# Altium PCB PCB1.PcbDoc
Units mil, origin at the board's own origin, x right, y up, seen from the top; angles counter-clockwise.
Board outline 840 x 840 mil, 2 copper layers (Top Layer, Bottom Layer); 11 components, 17 nets, 57 pads, 17 vias.
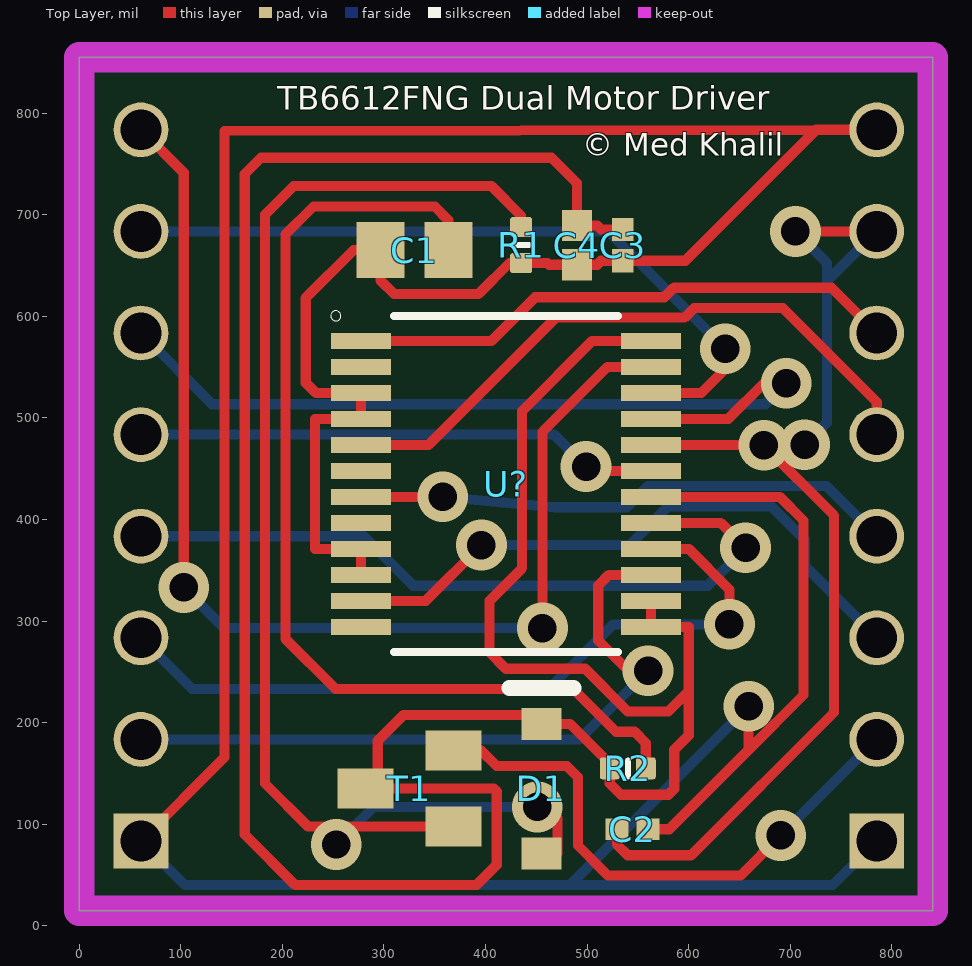
[diagram p0: Top Layer view]
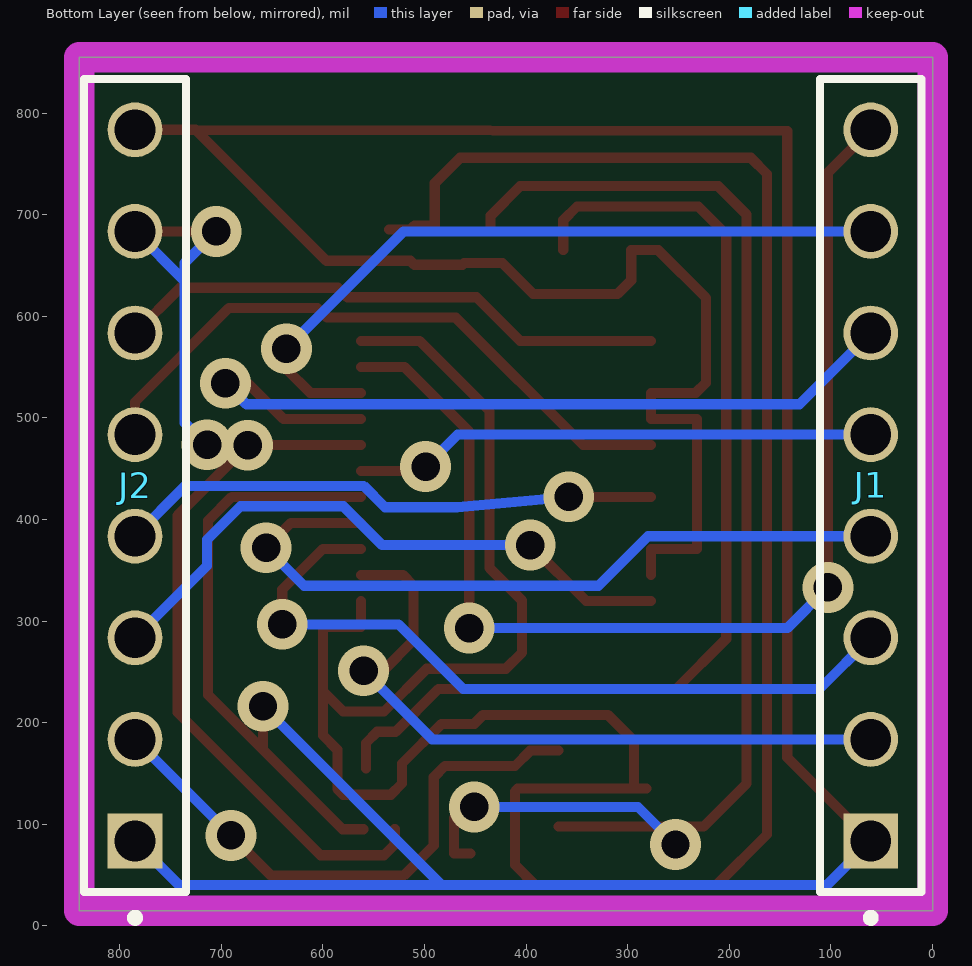
[diagram p1: Bottom Layer view, seen from below]
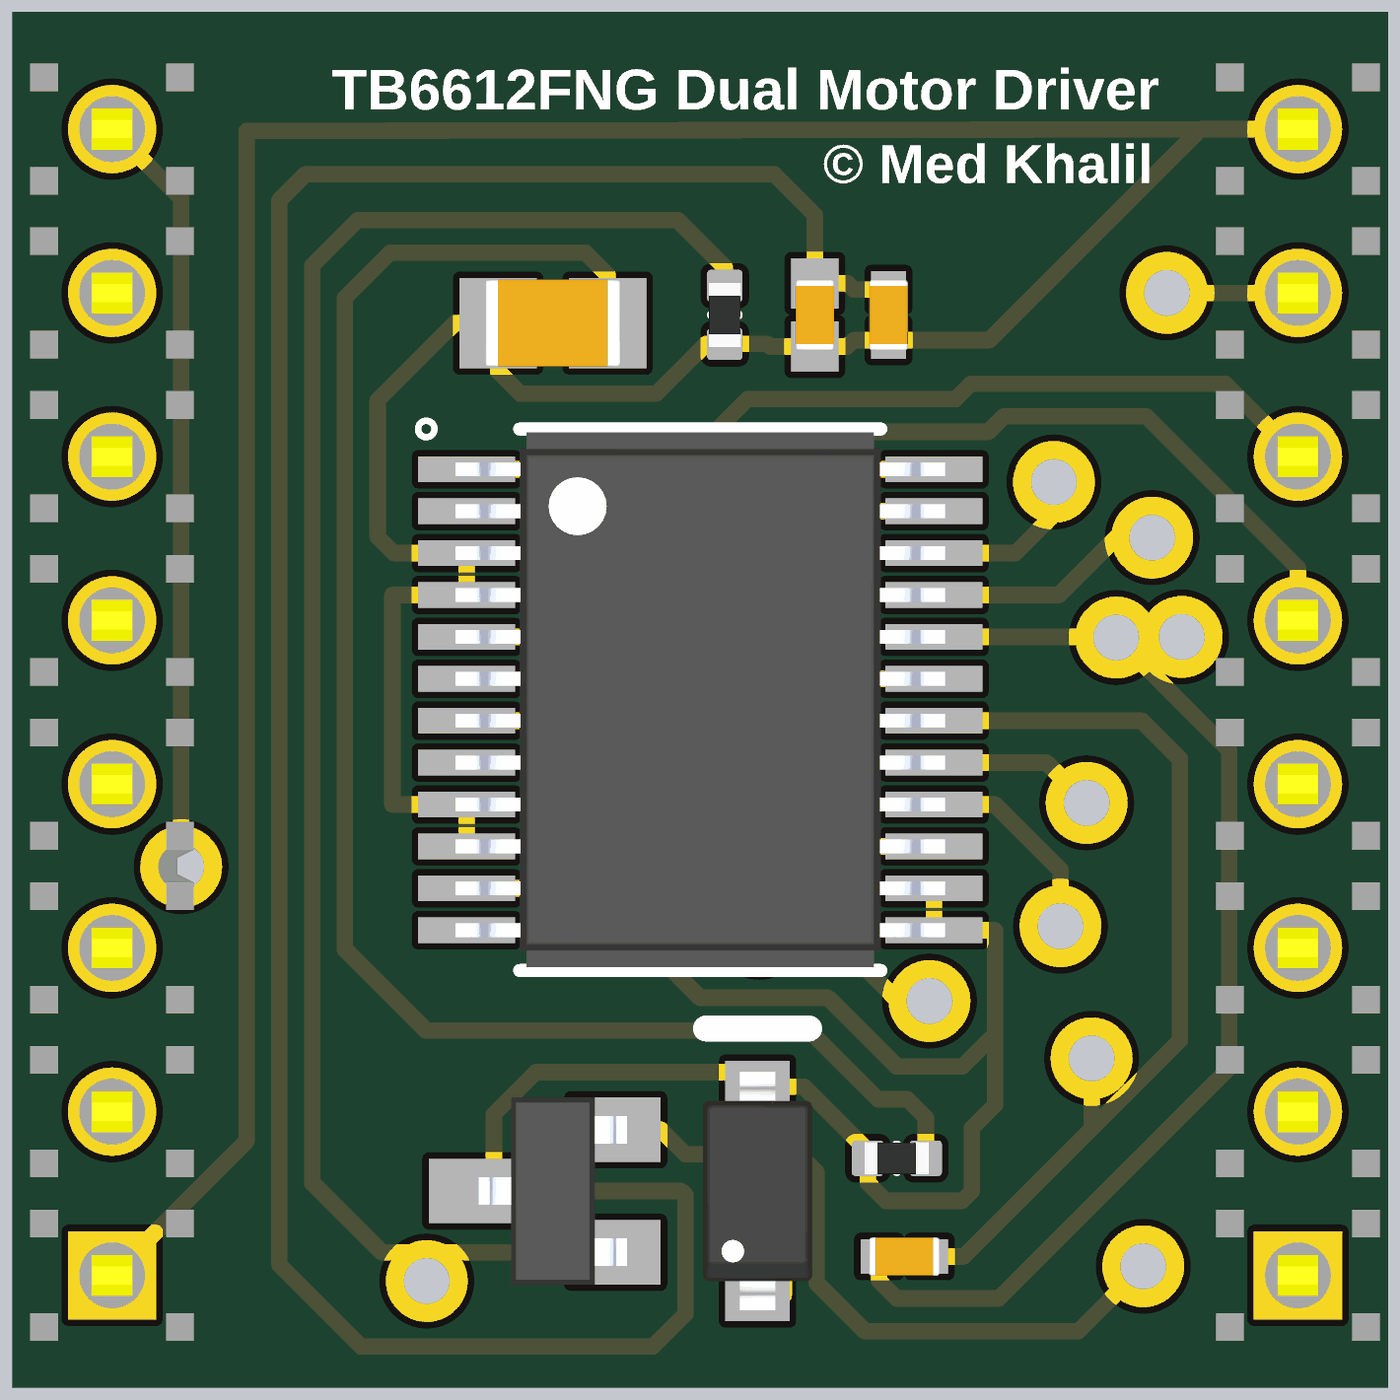
[diagram p2: 3D render of the assembled board from above, using the file's embedded part models]

## Layer stack, top to bottom
Top Solder: solder mask 0.4, Solder Resist, Dk 3.5
Top Layer: signal copper 1.4
Dielectric 1: dielectric 12.6, FR-4, Dk 4.8
Bottom Layer: signal copper 1.4
Bottom Solder: solder mask 0.4, Solder Resist, Dk 3.5

## Board outline
0,15 0,855 840,855 840,15

## Design rules (kind name [scope] priority, off if disabled: settings)
Clearance [All] p1: gap=10 ignorepadtopadclearanceinfootprint=FALSE
PolygonConnect [All] p1: connectstyle=Relief reliefconductorwidth=10 reliefentries=4 polygonreliefangle="90 Angle" airgapwidth=10
RoutingVias [All] p1: holewidth=28 width=50 viastyle="Through Hole" minholewidth=28 minwidth=50 maxholewidth=28 maxwidth=50
SolderMaskExpansion [All] p1: expansion=4 istentingtop=FALSE
SupplyNets "Schematic Supply Nets_3" [InNet('VMOT')] p1: voltage=0.000
SupplyNets "Schematic Supply Nets_2" [InNet('GND')] p2: voltage=0.000
SupplyNets "Schematic Supply Nets_1" [InNet('VCC')] p3: voltage=0.000
SupplyNets "Schematic Supply Nets" [InNet('VM')] p4: voltage=0.000
Width [All] p1: maxlimit=10 minlimit=10 preferedwidth=10
30 further rules are at their usual default settings.

## Components (designator, comment, footprint, x,y, rotation, side; value= is the part's Value field where it differs from the comment)
C1 "Capacitor 10 uF +/- 10% 16 V 0805" CAPC2013X135X45NL10T25 330,665 r0 top value=10µF
C2 "Capacitor 0.1 uF +/- 5% 16 V 0402" CAPC1005X56X25LL10T15 544.65,95 r0 top value=100nF
C3 "Capacitor 0.1 uF +/- 5% 16 V 0402" CAPC1005X56X25LL10T15 535,670 r90 top value=100nF
C4 "Capacitor 0.5 pF +/- 0.1pF 25 V 0402" CAPC1005X56X25ML10T15 490,670 r90 top value="0.47 uF"
D1 "CESD5V0D1" JSCJ-SOD-123-2_V 455,135 r90 top
J1 "TSW-108-07-G-S" SAMTEC_TSW-108-07-G-S 60.83,433.46 r90 bottom
J2 "TSW-108-07-G-S" SAMTEC_TSW-108-07-G-S 785,433.46 r90 bottom
R1 "100KR2F" RESC0402(1005)_L 435,670 r90 top value=100k
R2 "Resistor 9K1  +/-5 % 0402 63 mW" RESC0402(1005)_L 540,155 r180 top value=1k
T1 "PMV20EN" SOT23-BEC 325,135 r90 top
U? "TB6612FNG(O,C,8,EL" SOP65P760X160-24N 420,435 r0 top

## Footprints (in the part's own frame and the unit in brackets; to place one, negate y for a bottom-side part, rotate by r counter-clockwise, add the part's x,y. Pads: shape width x height; smd on the part's side, far side on the other; paste and mask are expansions set on the pad)
CAPC1005X56X25LL10T15 [mm] "Chip Capacitor, 2-Leads, Body 1.10x0.60mm, IPC High Density"
  rect 0.58x0.54 smd: 1(-0.39,0) 2(0.39,0)
  body extent -0.55,-0.3 0.55,0.3, height 0.56
CAPC1005X56X25ML10T15 [mm] "Chip Capacitor, 2-Leads, Body 1.10x0.60mm, IPC Low Density"
  rect 0.78x0.74 smd: 1(-0.49,0) 2(0.49,0)
  body extent -0.55,-0.3 0.55,0.3, height 0.56
CAPC2013X135X45NL10T25 [mm] "Chip Capacitor, 2-Leads, Body 2.10x1.35mm, IPC Medium Density"
  rect 1.2x1.4 smd: 1(-0.85,0) 2(0.85,0)
  body extent -1.05,-0.67 1.05,0.67, height 1.35
JSCJ-SOD-123-2_V [mm] "SOD, 2-Leads, Body 2.7x1.6mm"
  rect 0.8x1 smd: 1(-1.62,0) 2(1.62,0)
  silkscreen extent 2.52,-0.8 2.52,0.8, body extent -1.85,-0.85 1.85,0.85, height 1.25
RESC0402(1005)_L [mm] "Chip Resistor, Body 1.0x0.5mm, IPC High Density"
  rrect25% 0.5x0.55 smd: 1(-0.45,0) 2(0.45,0)
  silkscreen extent 0,-0.2 0,0.2, body extent -0.5,-0.25 0.5,0.25, height 0.3
SAMTEC_TSW-108-07-G-S [mm]
  rect 1.37x1.37 hole 1.02: 01(-8.89,0)
  round 1.37 hole 1.02: 02(-6.35,0) 03(-3.81,0) 04(-1.27,0) 05(1.27,0) 06(3.81,0) 07(6.35,0) 08(8.89,0)
  silkscreen extent -10.91,-1.27 10.16,1.27, body extent -10.16,-1.27 10.29,1.27, height 7.89
SOP65P760X160-24N [mm]
  rect 1.5x0.4 smd: 1(-3.625,3.575) 2(-3.625,2.925) 3(-3.625,2.275) 4(-3.625,1.625) 5(-3.625,0.975) 6(-3.625,0.325) 7(-3.625,-0.325) 8(-3.625,-0.975) 9(-3.625,-1.625) 10(-3.625,-2.275) 11(-3.625,-2.925) 12(-3.625,-3.575) 13(3.625,-3.575) 14(3.625,-2.925) 15(3.625,-2.275) 16(3.625,-1.625) 17(3.625,-0.975) 18(3.625,-0.325) 19(3.625,0.325) 20(3.625,0.975) 21(3.625,1.625) 22(3.625,2.275) 23(3.625,2.925) 24(3.625,3.575)
  silkscreen extent -4.38,-4.2 2.8,4.33, body extent -3.8,-4.15 3.8,4.15, height 1.6
SOT23-BEC [mm]
  rect 1x1.4 smd: B(-0.95,-1.1) C(0,1.1) E(0.95,-1.1)
  body extent -1.45,-1.28 1.45,1.02, height 1.1

## Part data
C1: library part CMP-001-00015-6, "Chip Capacitor, 10 uF, +/- 10%, 16 V, 0805 (2012 Metric)", Capacitor Type=Ceramic, Case/Package=0805, Max Operating Temperature=85°C, Min Operating Temperature=-55°C, Tolerance=10%, Voltage Rating=16V, Mounting Technology=SM, Pins=2, RoHS Compliant=True
C2 C3: library part CMP-001-00001-6, "Chip Capacitor, 0.1 uF, +/- 5%, 16 V, 0402 (1005 Metric)", Capacitor Type=Ceramic, Case/Package=0402, Max Operating Temperature=125°C, Min Operating Temperature=-55°C, Tolerance=5%, Voltage Rating=16V, Mounting Technology=SM, Pins=2, RoHS Compliant=True
C4: library part CMP-001-00002-6, "Chip Capacitor, 0.5 pF, +/- 0.1pF, 25 V, 0402 (1005 Metric)", Capacitor Type=Ceramic, Case/Package=0402, Max Operating Temperature=125°C, Min Operating Temperature=-55°C, Tolerance=20%, Voltage Rating=25V, Mounting Technology=SM, Pins=2, RoHS Compliant=True
D1: library part CMP-004-00020-2, "Uni-driection ESD Protection Diode, 5 V, 1 uA, 2-Pin SOD-123, RoHS, Tape and Reel", Case/Package=SOD-123-2, Manufacturer="Jiangsu Changjiang Electronics Technology", Package Description="2-Pin Surface Mount Device, Body 2.7 x 1.6 mm", Datasheet URL=http://www.cj-elec.com/gallery/txUpfile/f05a5831e2d7f622a930855050fbe076.pdf, Datasheet Version="Rev. B, 04/2014", Mounting Technology=SM, Package Reference=SOD-123-2, Package URL=http://www.cj-elec.com/txUpfile/201412112231195145.pdf, RoHS Compliant=Unknown
J1 J2: Package=None, Availability=Unavailable, MF=Samtec, MP=TSW-108-07-G-S, Price=None
R1: library part CMP-009-00064-2, "100K 0.063W 1% 0402 (1005 Metric)  SMD", Case/Package=0402, Power=63mW, Tolerance=1%, Mounting Technology=SMT, Pins=2
R2: library part CMP-009-00135-3, "Chip Resistor, 9,1 kOhms, +/-5 %, 63 mW, -55 to 155 degC, 0402", Case/Package=0402, Max Operating Temperature=155°C, Min Operating Temperature=-55°C, Power=63mW, Tolerance=5%, Pins=2
T1: "MOSFET, N-CH, 30V, 7.6A, SOT-23-3", Package="SOT-23-3 NXP Semiconductors", Check_prices=https://www.snapeda.com/parts/PMV20EN/NXP+Semiconductors/view-part/?ref=eda, MF="NXP Semiconductors", MP=PMV20EN, SnapEDA_Link=https://www.snapeda.com/parts/PMV20EN/NXP+Semiconductors/view-part/?ref=snap
U?: "DC Motor Driver 3V 24-Pin SSOP T/R", Package="SSOP-24 Toshiba", Availability="Not in stock", Check_prices=https://www.snapeda.com/parts/TB6612FNG(O,C,8,EL/Toshiba/view-part/?ref=eda, MF=Toshiba, MP=TB6612FNG(O,C,8,EL, Price=None, SnapEDA_Link=https://www.snapeda.com/parts/TB6612FNG(O,C,8,EL/Toshiba/view-part/?ref=snap

## Via types
v1: diameter 50, hole 28, Top Layer to Bottom Layer, 17 vias

## Nets (pads, with @x,y where several pads share a name; then routed paths per layer and width w, separated by ;. In a path a pad name is that pad's centre, name@x,y a point inside that pad or via, vN(x,y) a via of type N, cw(c..) or ccw(c..) an arc to the next point about the centre after c; other vN are vias at no path point)
AIN1: J1.06 U?.21 | length 820.5
  Top Layer w10: U?.21 639,498.98 674.02,534 v1(696,534)
  Bottom Layer w10: J1.06 130.9,513.39 675.39,513.39 v1(696,534)
AIN2: J1.07 U?.22 | length 726
  Top Layer w10: U?.22 612.57,524.57 636,548 v1(636,568)
  Bottom Layer w10: J1.07 520.54,683.46 v1(636,568)
AO1: J2.06 U?.1 | length 547.8
  Top Layer w10: U?.1 406,575.75 448.88,618.62 576,618.62 585.38,628 740.46,628 J2.06
AO2: J2.05 U?.5 | length 633.9
  Top Layer w10: U?.5 344,473.39 469.24,598.62 596,598.62 605.38,608 692.62,608 785,515.62 J2.05
BIN1: J1.04 U?.17 | length 734.3
  Top Layer w10: U?.17 631.39,396.61 v1(656,372)
  Bottom Layer w10: J1.04 280.06,383.46 328.85,334.67 618.67,334.67 v1(656,372)
BIN2: J1.03 U?.16 | length 754.6
  Top Layer w10: U?.16 600,371.02 640,331.02 v1(640,296.71)
  Bottom Layer w10: J1.03 111.29,233 462,233 525.71,296.71 v1(640,296.71)
BO1: J2.03 U?.11 | length 615
  Top Layer w10: U?.11 341.17,319.84 v1(396,374.67)
  Bottom Layer w10: v1(396,374.67) 541.67,374.67 580,413 681.19,413 714.19,380 714.19,354.28 J2.03
BO2: J2.04 U?.7 | length 537.4
  Top Layer w10: U?.7 v1(358,422.2)
  Bottom Layer w10: v1(358,422.2) 468,412 539,412 560,433 735.46,433 J2.04
GND: C1.1 C2.2 C3.1 C4.1 J1.01 J2.01 J2.08 R1.1 U?.3 U?.4 U?.9 U?.10 U?.18 | length 4062.6
  Top Layer w10: J1.01 143,165.64 143,782.38 725.38,783.36 ; U?.10 U?.9 232,371.02 232,498.98 U?.4 U?.3 233,524.57 223,534.57 223,618 270,665 C1.1 296.54,635.46 310,622 393.25,622 423.54,652.28 R1.1 461,652.28 462.58,650.71 C4.1 510,650.71 513.94,654.65 C3.1 596.67,654.65 725.38,783.36 ; C2.2 580.83,95 659,173.17 ; U?.18 689.69,422.2 713,398.89 713,227.17 659,173.17 ; v1(659,216) 659,173.17 ; 725.38,783.36 725.48,783.46 J2.08 725.38,783.36
  Bottom Layer w10: J1.01 104.29,40 483,40 ; v1(659,216) 483,40 ; J2.01 741.54,40 483,40
NetC1_2: C1.2 R2.1 | length 1027.1
  Top Layer w10: C1.2 363.46,694.54 350,708 230.62,708 203,680.38 203,282.48 252.48,233 486.45,233 528.45,191 546.72,191 557.72,180 R2.1
NetD1_1: D1.1 R1.2 T1.B | length 1363.3
  Top Layer w10: v1(253,80) v1@270.6,97.6 ; T1.B v1@270.6,97.6 ; R1.2 435,699 406,728 211,728 183,700 183,140 225.4,97.6 v1@270.6,97.6 ; v1(451,117) 460,117 471,106 471,71.22 D1.1
  Bottom Layer w10: v1(253,80) 290,117 v1(451,117)
PWMA: J1.08 U?.23 | length 1163.9
  Top Layer w10: J1.08 103,741.29 v1(103,333) ; v1(456,293) 456,486.16 520,550.16 U?.23
  Bottom Layer w10: v1(103,333) 143,293 v1(456,293)
PWMB: J1.02 U?.15 | length 698.8
  Top Layer w10: v1(560,251) 540.73,251 511,280.73 511,335 521.43,345.43 U?.15
  Bottom Layer w10: J1.02 492.46,183.46 v1(560,251)
STBY: J1.05 U?.19 | length 516.7
  Top Layer w10: v1(499,452) 503.2,447.8 U?.19
  Bottom Layer w10: J1.05 467.54,483.46 v1(499,452)
VCC: C2.1 J2.07 U?.20 | length 1187.1
  Top Layer w10: C2.1 529.29,80 539.92,69.37 602.37,69.37 743,210 743,404 v1(674,473) ; U?.20 v1(714,473.39) ; v1(705,683.46) J2.07
  Bottom Layer w10: v1(674,473) 714,473 736,495 736,495.39 ; v1(705,683.46) 736,652.46 736,634.46 ; v1(714,473.39) 736,495.39 ; J2.07 736,634.46 ; 736,495.39 736,634.46
VM: C3.2 C4.2 D1.2 R2.2 T1.C U?.13 U?.14 U?.24 | length 2820.8
  Top Layer w10: T1.C T1.C@294,135 ; C3.2 513.94,685.35 510,689.29 C4.2 490,731 465,756 179,756 163,740 163,89.88 212.88,40 391,40 411,60 411,132.28 408.28,135 T1.C@294,135 ; U?.14 U?.13 600,294.25 600,231 ; U?.24 505,575.75 436,506.75 436,352 404,320 404,269 420,253 498,253 540,211 580,211 600,231 ; T1.C@294,135 294,182 319.59,207.59 442.19,207.59 451,198.78 D1.2 483.22,198.78 522.28,159.72 R2.2 522.28,140 533.28,129 580,129 585.83,134.83 585.83,173.29 600,187.46 600,231
VMOT: J2.02 T1.E | length 562.6
  Top Layer w10: T1.E 395.93,172.4 411,157.34 480,157.34 491,146.34 491,79 520.63,49.37 650.9,49.37 v1(690.54,89)
  Bottom Layer w10: v1(690.54,89) J2.02
pads on no net: U?.2 U?.6 U?.8 U?.12

## Keep-outs
Keep-Out Layer:
  the board outline again, w30

## Silkscreen, mask and mechanical layers (free items; w line width, h text height)
Top Overlay:
  text "TB6612FNG Dual Motor Driver" at 195,795.48 h40
  text "© Med Khalil" at 495,750.6 h38